# EAGLE board 13781-Variable_Load-panel.v10 (EAGLE 7.5.0), part 1 of 2
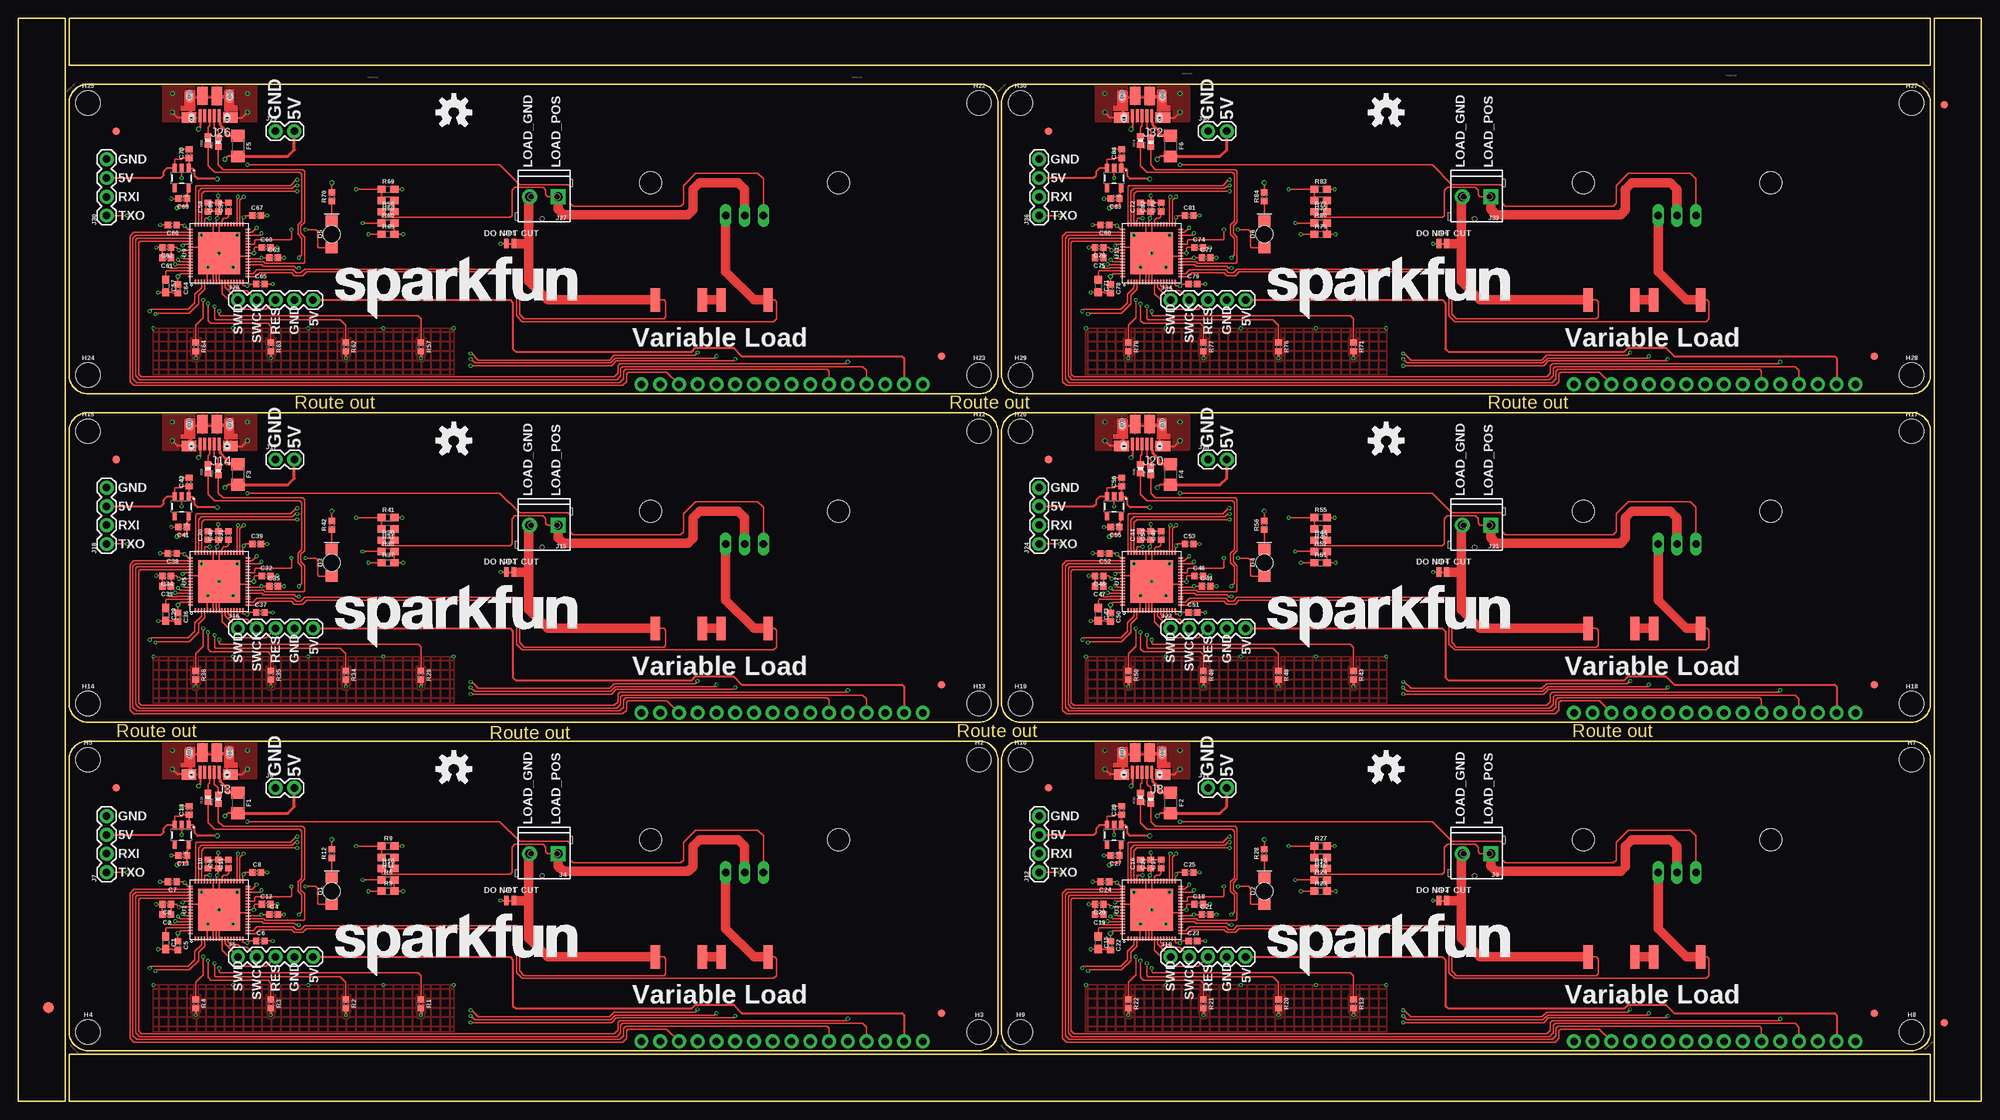
[diagram p0: board, top side]
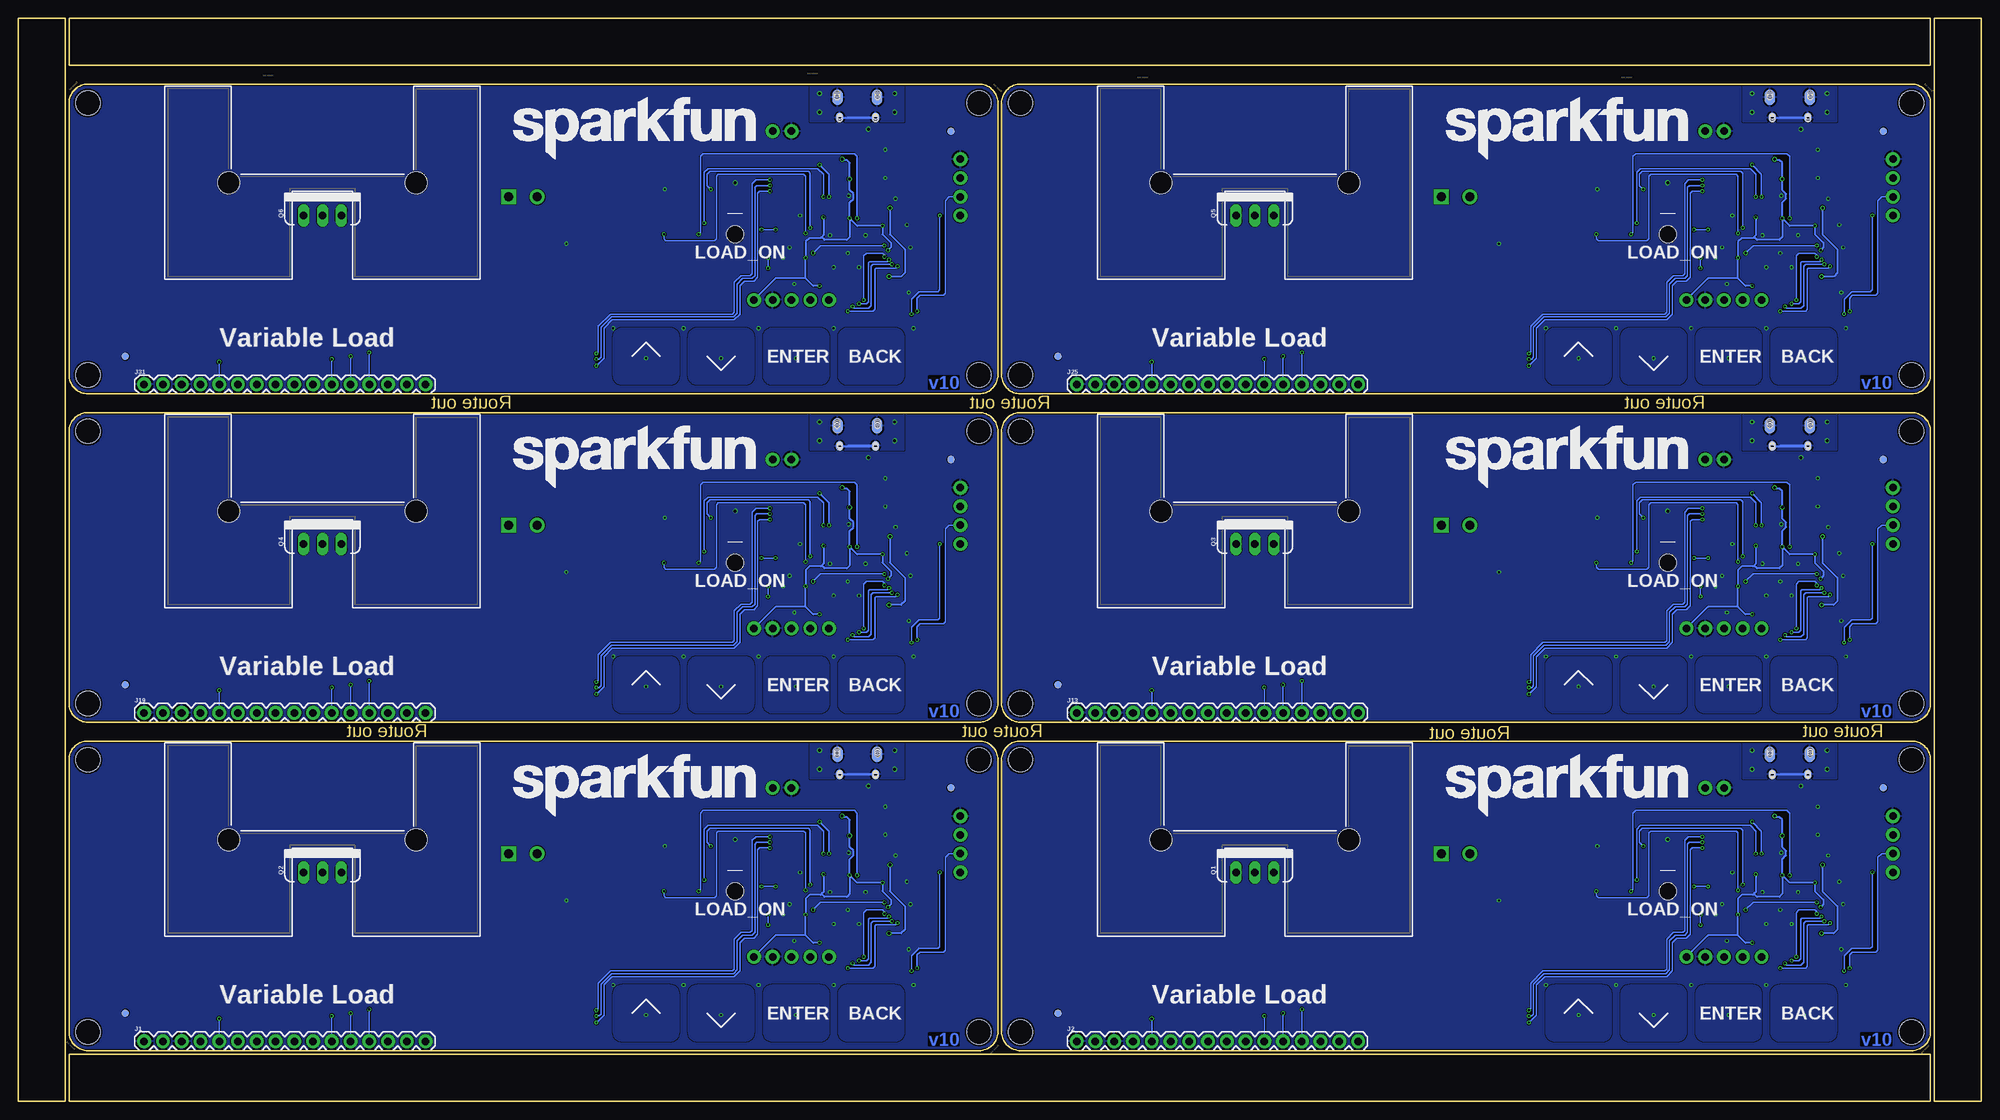
[diagram p1: board, bottom side, seen from below]

Size 265.68 x 146.56 mm. Coordinates in mm from the lower left corner, seen from the top.
Outline: 79.25,0 6.86,0 6.86,6.35 29.72,6.35
Outline: 27.18,6.35 258.83,6.35 258.83,0 76.71,0
Outline: 6.35,72.39 6.35,0 0,0 0,22.86
Outline: 0,20.32 0,146.56 6.35,146.56 6.35,69.85
Outline: 186.44,146.56 258.83,146.56 258.83,140.21 235.97,140.21
Outline: 238.51,140.21 6.86,140.21 6.86,146.56 188.98,146.56
Outline: 259.33,72.14 259.33,146.56 265.68,146.56 265.68,121.67
Outline: 265.68,124.21 265.68,0 259.33,0 259.33,74.68
Outline: 9.4,6.86 130.05,6.86 arc90 132.59,9.4 132.59,46.23 arc90 130.05,48.77 9.4,48.77 arc90 6.86,46.23 6.86,9.4 arc90 9.4,6.86
Outline: 135.64,6.86 256.29,6.86 arc90 258.83,9.4 258.83,46.23 arc90 256.29,48.77 135.64,48.77 arc90 133.1,46.23 133.1,9.4 arc90 135.64,6.86
Outline: 9.4,51.31 130.05,51.31 arc90 132.59,53.85 132.59,90.68 arc90 130.05,93.22 9.4,93.22 arc90 6.86,90.68 6.86,53.85 arc90 9.4,51.31
Outline: 135.64,51.31 256.29,51.31 arc90 258.83,53.85 258.83,90.68 arc90 256.29,93.22 135.64,93.22 arc90 133.1,90.68 133.1,53.85 arc90 135.64,51.31
Outline: 9.4,95.76 130.05,95.76 arc90 132.59,98.3 132.59,135.13 arc90 130.05,137.67 9.4,137.67 arc90 6.86,135.13 6.86,98.3 arc90 9.4,95.76
Outline: 135.64,95.76 256.29,95.76 arc90 258.83,98.3 258.83,135.13 arc90 256.29,137.67 135.64,137.67 arc90 133.1,135.13 133.1,98.3 arc90 135.64,95.76
Copper layers (1*16): Top 0.035mm / dielectric 1.5mm / Bottom 0.035mm
Design rules "SparkFun-2-layer-FAB-LIMIT": minimum track width 4mil, minimum drill 6mil, track to track 4mil, track to pad 4mil, pad to pad 4mil, via to via 4mil, smd to smd 4mil, copper to edge 4mil, drill to drill 4mil, minimum pad ring 5mil, minimum via ring 5mil, stop-mask expansion 4mil, vias tented up to drill 25mil, thermal gap 10mil
tRestrict: 6 lines

## Footprints (pad centres in the part's own frame; a part is rotated, then mirrored left to right if it is on the bottom)
0603 = smd 1.1 x 1: 1 -0.85,0; 2 0.85,0
0402 = smd 0.85 x 0.9: 1 -0.58,0; 2 0.58,0
LED-1206-BOTTOM = smd 1.5 x 1.6: A -1.8,0; C 1.8,0 | hole 2.3: 0,0
FIDUCIAL-1.5X3 = smd 1.5 x 1.5: 1 0,0
FIDUCIAL-1X2 = smd 1 x 1: 1 0,0
1206 = smd 1.6 x 1.8: 1 -1.4,0; 2 1.4,0
6400BG_HEATSINK = hole 2.997: -12.7,0; 12.7,0
STAND-OFF = hole 3.302: 0,0
1X16 = drill 1.016 pad 1.88: 1 0,0; 2 2.54,0; 3 5.08,0; 4 7.62,0; 5 10.16,0; 6 12.7,0; 7 15.24,0; 8 17.78,0; 9 20.32,0; 10 22.86,0; 11 25.4,0; 12 27.94,0; 13 30.48,0; 14 33.02,0; 15 35.56,0; 16 38.1,0
USB-MICROB-PTH = smd 0.4 x 1.75: D+ 0.031,1.331; D- -0.619,1.331; GND 1.331,1.331; ID 0.681,1.331; VBUS -1.269,1.331 | smd 1.4 x 2.1 bottom: P$1 2.701,-1.142; P$3 -2.659,-1.144 | smd 1 x 1.3: P$2 2.487,1.594; P$6 -2.368,1.604 | smd 1 x 1.3 bottom: P$4 -2.368,1.604; P$10 2.481,1.598 | smd 1.1 x 1.5: P$8 2.701,-1.142; P$12 -2.659,-1.144 | smd 2 x 1.46: SHEILD2 2.831,1.606; SHIELD -2.794,1.606 | smd 1.425 x 2.5: SHIELD3 -0.979,-1.349; SHIELD4 0.996,-1.352 | hole 0.7: -2.693,-1.134; -2.693,-1.3; -2.694,-1.499; -2.694,-1.664; 2.768,-1.134; 2.767,-1.303; 2.766,-1.496; 2.766,-1.664 | hole 0.66: -2.359,1.821; -2.349,1.691; -2.359,1.541; -2.354,1.432; 2.481,1.821; 2.491,1.691; 2.481,1.541; 2.486,1.432
SCREWTERMINAL-3.5MM-2_LOCK = drill 1.2 pad 2.032 square: 1 -0.178,0 | drill 1.2 pad 2.032: 2 3.678,0
1X05 = drill 1.016 pad 1.88: 1 0,0; 2 2.54,0; 3 5.08,0; 4 7.62,0; 5 10.16,0
1X02 = drill 1.016 pad 1.88: 1 0,0; 2 2.54,0
1X04 = drill 1.016 pad 1.88: 1 0,0; 2 2.54,0; 3 5.08,0; 4 7.62,0
SMT-JUMPER_2_NC_TRACE_NO-SILK = smd 0.635 x 1.27: 1 -0.508,0; 2 0.508,0
TO220V = drill 1.016 long: 1 -2.54,0; 2 0,0; 3 2.54,0
2512 = smd 1.27 x 3.175: P$1 -3.175,0; P$2 3.175,0
0402-RES = smd 0.85 x 0.9: 1 -0.58,0; 2 0.58,0
QFN-68 = smd 0.6 x 0.2: 1 -3.9,3.2; 2 -3.9,2.8; 3 -3.9,2.4; 4 -3.9,2; 5 -3.9,1.6; 6 -3.9,1.2; 7 -3.9,0.8; 8 -3.9,0.4; 9 -3.9,0; 10 -3.9,-0.4; 11 -3.9,-0.8; 12 -3.9,-1.2; 13 -3.9,-1.6; 14 -3.9,-2; 15 -3.9,-2.4; 16 -3.9,-2.8; 17 -3.9,-3.2; 35 3.9,-3.2; 36 3.9,-2.8; 37 3.9,-2.4; 38 3.9,-2; 39 3.9,-1.6; 40 3.9,-1.2; 41 3.9,-0.8; 42 3.9,-0.4; 43 3.9,0; 44 3.9,0.4; 45 3.9,0.8; 46 3.9,1.2; 47 3.9,1.6; 48 3.9,2; 49 3.9,2.4; 50 3.9,2.8; 51 3.9,3.2 | smd 0.2 x 0.6: 18 -3.2,-3.9; 19 -2.8,-3.9; 20 -2.4,-3.9; 21 -2,-3.9; 22 -1.6,-3.9; 23 -1.2,-3.9; 24 -0.8,-3.9; 25 -0.4,-3.9; 26 0,-3.9; 27 0.4,-3.9; 28 0.8,-3.9; 29 1.2,-3.9; 30 1.6,-3.9; 31 2,-3.9; 32 2.4,-3.9; 33 2.8,-3.9; 34 3.2,-3.9; 52 3.2,3.9; 53 2.8,3.9; 54 2.4,3.9; 55 2,3.9; 56 1.6,3.9; 57 1.2,3.9; 58 0.8,3.9; 59 0.4,3.9; 60 0,3.9; 61 -0.4,3.9; 62 -0.8,3.9; 63 -1.2,3.9; 64 -1.6,3.9; 65 -2,3.9; 66 -2.4,3.9; 67 -2.8,3.9; 68 -3.2,3.9 | smd 5.7 x 5.7: 69 0,0
SOT23-5 = smd 0.55 x 1.2: 1 -0.95,-1.3; 2 0,-1.3; 3 0.95,-1.3; 4 0.95,1.3; 5 -0.95,1.3

## Placement (x,y rotation side)
C1  2.2nF  [0603]  19.94,21.46 270 top
C2  0.1uF  [0402]  20.07,25.27 180 top
C3  1.0uF  [0402]  20.07,26.67 180 top
C4  0.1uF  [0402]  34.54,25.27 0 top
C5  0.1uF  [0402]  21.59,21.08 270 top
C6  0.1uF  [0402]  32.77,21.72 0 top
C7  0.1uF  [0402]  20.83,29.72 180 top
C8  0.1uF  [0402]  32.26,30.99 0 top
C9  0.1uF  [0402]  27.05,32.13 90 top
C10  1.0uF  [0402]  25.65,32.13 90 top
C11  1.0uF  [0402]  28.45,32.13 90 top
C12  1.0uF  [0402]  33.53,26.67 0 top
C13  1.0uF  [0402]  22.23,33.27 180 top
C14  1.0uF  [0402]  23.11,39.37 90 top
C15  2.2nF  [0603]  146.18,21.46 270 top
C16  1.0uF  [0402]  151.89,32.13 90 top
C17  1.0uF  [0402]  154.69,32.13 90 top
C18  1.0uF  [0402]  159.77,26.67 0 top
C19  0.1uF  [0402]  146.3,25.27 180 top
C20  1.0uF  [0402]  146.3,26.67 180 top
C21  0.1uF  [0402]  160.78,25.27 0 top
C22  0.1uF  [0402]  147.83,21.08 270 top
C23  0.1uF  [0402]  159,21.72 0 top
C24  0.1uF  [0402]  147.07,29.72 180 top
C25  0.1uF  [0402]  158.5,30.99 0 top
C26  0.1uF  [0402]  153.29,32.13 90 top
C27  1.0uF  [0402]  148.46,33.27 180 top
C28  1.0uF  [0402]  149.35,39.37 90 top
C29  2.2nF  [0603]  19.94,65.91 270 top
C30  1.0uF  [0402]  25.65,76.58 90 top
C31  1.0uF  [0402]  28.45,76.58 90 top
C32  1.0uF  [0402]  33.53,71.12 0 top
C33  0.1uF  [0402]  20.07,69.72 180 top
C34  1.0uF  [0402]  20.07,71.12 180 top
C35  0.1uF  [0402]  34.54,69.72 0 top
C36  0.1uF  [0402]  21.59,65.53 270 top
C37  0.1uF  [0402]  32.77,66.17 0 top
C38  0.1uF  [0402]  20.83,74.17 180 top
C39  0.1uF  [0402]  32.26,75.44 0 top
C40  0.1uF  [0402]  27.05,76.58 90 top
C41  1.0uF  [0402]  22.23,77.72 180 top
C42  1.0uF  [0402]  23.11,83.82 90 top
C43  2.2nF  [0603]  146.18,65.91 270 top
C44  1.0uF  [0402]  151.89,76.58 90 top
C45  1.0uF  [0402]  154.69,76.58 90 top
C46  1.0uF  [0402]  159.77,71.12 0 top
C47  0.1uF  [0402]  146.3,69.72 180 top
C48  1.0uF  [0402]  146.3,71.12 180 top
C49  0.1uF  [0402]  160.78,69.72 0 top
C50  0.1uF  [0402]  147.83,65.53 270 top
C51  0.1uF  [0402]  159,66.17 0 top
C52  0.1uF  [0402]  147.07,74.17 180 top
C53  0.1uF  [0402]  158.5,75.44 0 top
C54  0.1uF  [0402]  153.29,76.58 90 top
C55  1.0uF  [0402]  148.46,77.72 180 top
C56  1.0uF  [0402]  149.35,83.82 90 top
C57  2.2nF  [0603]  19.94,110.36 270 top
C58  1.0uF  [0402]  25.65,121.03 90 top
C59  1.0uF  [0402]  28.45,121.03 90 top
C60  1.0uF  [0402]  33.53,115.57 0 top
C61  0.1uF  [0402]  20.07,114.17 180 top
C62  1.0uF  [0402]  20.07,115.57 180 top
C63  0.1uF  [0402]  34.54,114.17 0 top
C64  0.1uF  [0402]  21.59,109.98 270 top
C65  0.1uF  [0402]  32.77,110.62 0 top
C66  0.1uF  [0402]  20.83,118.62 180 top
C67  0.1uF  [0402]  32.26,119.89 0 top
C68  0.1uF  [0402]  27.05,121.03 90 top
C69  1.0uF  [0402]  22.23,122.17 180 top
C70  1.0uF  [0402]  23.11,128.27 90 top
C71  2.2nF  [0603]  146.18,110.36 270 top
C72  1.0uF  [0402]  151.89,121.03 90 top
C73  1.0uF  [0402]  154.69,121.03 90 top
C74  1.0uF  [0402]  159.77,115.57 0 top
C75  0.1uF  [0402]  146.3,114.17 180 top
C76  1.0uF  [0402]  146.3,115.57 180 top
C77  0.1uF  [0402]  160.78,114.17 0 top
C78  0.1uF  [0402]  147.83,109.98 270 top
C79  0.1uF  [0402]  159,110.62 0 top
C80  0.1uF  [0402]  147.07,118.62 180 top
C81  0.1uF  [0402]  158.5,119.89 0 top
C82  0.1uF  [0402]  153.29,121.03 90 top
C83  1.0uF  [0402]  148.46,122.17 180 top
C84  1.0uF  [0402]  149.35,128.27 90 top
D1  GREEN  [LED-1206-BOTTOM]  42.42,28.45 90 top
D2  GREEN  [LED-1206-BOTTOM]  168.66,28.45 90 top
D3  GREEN  [LED-1206-BOTTOM]  42.42,72.9 90 top
D4  GREEN  [LED-1206-BOTTOM]  168.66,72.9 90 top
D5  GREEN  [LED-1206-BOTTOM]  42.42,117.35 90 top
D6  GREEN  [LED-1206-BOTTOM]  168.66,117.35 90 top
E$1  [FIDUCIAL-1.5X3]  4.06,12.7 0 top
E$7  [FIDUCIAL-1X2]  260.73,134.87 180 top
E$8  [FIDUCIAL-1X2]  260.73,10.67 0 top
F1  6V/0.5A  [1206]  29.72,40.39 270 top
F2  6V/0.5A  [1206]  155.96,40.39 270 top
F3  6V/0.5A  [1206]  29.72,84.84 270 top
F4  6V/0.5A  [1206]  155.96,84.84 270 top
F5  6V/0.5A  [1206]  29.72,129.29 270 top
F6  6V/0.5A  [1206]  155.96,129.29 270 top
FD1  FIDUCIAL1X2  [FIDUCIAL-1X2]  124.97,11.94 0 bottom
FD2  FIDUCIAL1X2  [FIDUCIAL-1X2]  13.21,42.42 0 bottom
FD3  FIDUCIAL1X2  [FIDUCIAL-1X2]  124.97,11.94 0 top
FD4  FIDUCIAL1X2  [FIDUCIAL-1X2]  13.21,42.42 0 top
FD5  FIDUCIAL1X2  [FIDUCIAL-1X2]  251.21,11.94 0 bottom
FD6  FIDUCIAL1X2  [FIDUCIAL-1X2]  139.45,42.42 0 bottom
FD7  FIDUCIAL1X2  [FIDUCIAL-1X2]  251.21,11.94 0 top
FD8  FIDUCIAL1X2  [FIDUCIAL-1X2]  139.45,42.42 0 top
FD9  FIDUCIAL1X2  [FIDUCIAL-1X2]  124.97,56.39 0 bottom
FD10  FIDUCIAL1X2  [FIDUCIAL-1X2]  13.21,86.87 0 bottom
FD11  FIDUCIAL1X2  [FIDUCIAL-1X2]  124.97,56.39 0 top
FD12  FIDUCIAL1X2  [FIDUCIAL-1X2]  13.21,86.87 0 top
FD13  FIDUCIAL1X2  [FIDUCIAL-1X2]  251.21,56.39 0 bottom
FD14  FIDUCIAL1X2  [FIDUCIAL-1X2]  139.45,86.87 0 bottom
FD15  FIDUCIAL1X2  [FIDUCIAL-1X2]  251.21,56.39 0 top
FD16  FIDUCIAL1X2  [FIDUCIAL-1X2]  139.45,86.87 0 top
FD17  FIDUCIAL1X2  [FIDUCIAL-1X2]  124.97,100.84 0 bottom
FD18  FIDUCIAL1X2  [FIDUCIAL-1X2]  13.21,131.32 0 bottom
FD19  FIDUCIAL1X2  [FIDUCIAL-1X2]  124.97,100.84 0 top
FD20  FIDUCIAL1X2  [FIDUCIAL-1X2]  13.21,131.32 0 top
FD21  FIDUCIAL1X2  [FIDUCIAL-1X2]  251.21,100.84 0 bottom
FD22  FIDUCIAL1X2  [FIDUCIAL-1X2]  139.45,131.32 0 bottom
FD23  FIDUCIAL1X2  [FIDUCIAL-1X2]  251.21,100.84 0 top
FD24  FIDUCIAL1X2  [FIDUCIAL-1X2]  139.45,131.32 0 top
H1  6400BG_HEATSINK  [6400BG_HEATSINK]  98.3,35.43 180 bottom
H2  STAND-OFF  [STAND-OFF]  130.05,46.23 0 top
H3  STAND-OFF  [STAND-OFF]  130.05,9.4 0 top
H4  STAND-OFF  [STAND-OFF]  9.4,9.4 0 top
H5  STAND-OFF  [STAND-OFF]  9.4,46.23 0 top
H6  6400BG_HEATSINK  [6400BG_HEATSINK]  224.54,35.43 180 bottom
H7  STAND-OFF  [STAND-OFF]  256.29,46.23 0 top
H8  STAND-OFF  [STAND-OFF]  256.29,9.4 0 top
H9  STAND-OFF  [STAND-OFF]  135.64,9.4 0 top
H10  STAND-OFF  [STAND-OFF]  135.64,46.23 0 top
H11  6400BG_HEATSINK  [6400BG_HEATSINK]  98.3,79.88 180 bottom
H12  STAND-OFF  [STAND-OFF]  130.05,90.68 0 top
H13  STAND-OFF  [STAND-OFF]  130.05,53.85 0 top
H14  STAND-OFF  [STAND-OFF]  9.4,53.85 0 top
H15  STAND-OFF  [STAND-OFF]  9.4,90.68 0 top
H16  6400BG_HEATSINK  [6400BG_HEATSINK]  224.54,79.88 180 bottom
H17  STAND-OFF  [STAND-OFF]  256.29,90.68 0 top
H18  STAND-OFF  [STAND-OFF]  256.29,53.85 0 top
H19  STAND-OFF  [STAND-OFF]  135.64,53.85 0 top
H20  STAND-OFF  [STAND-OFF]  135.64,90.68 0 top
H21  6400BG_HEATSINK  [6400BG_HEATSINK]  98.3,124.33 180 bottom
H22  STAND-OFF  [STAND-OFF]  130.05,135.13 0 top
H23  STAND-OFF  [STAND-OFF]  130.05,98.3 0 top
H24  STAND-OFF  [STAND-OFF]  9.4,98.3 0 top
H25  STAND-OFF  [STAND-OFF]  9.4,135.13 0 top
H26  6400BG_HEATSINK  [6400BG_HEATSINK]  224.54,124.33 180 bottom
H27  STAND-OFF  [STAND-OFF]  256.29,135.13 0 top
H28  STAND-OFF  [STAND-OFF]  256.29,98.3 0 top
H29  STAND-OFF  [STAND-OFF]  135.64,98.3 0 top
H30  STAND-OFF  [STAND-OFF]  135.64,135.13 0 top
J1  [1X16]  248.67,8.13 0 bottom
J2  [1X16]  122.43,8.13 0 bottom
J3  AMP FCI 10103594-0001LF  [USB-MICROB-PTH]  25.91,45.85 180 top
J4  [SCREWTERMINAL-3.5MM-2_LOCK]  72.9,33.53 180 top
J5  [1X05]  29.72,19.56 0 top
J6  [1X02]  34.8,42.42 0 top
J7  [1X04]  11.94,30.99 90 top
J8  AMP FCI 10103594-0001LF  [USB-MICROB-PTH]  152.15,45.85 180 top
J9  [SCREWTERMINAL-3.5MM-2_LOCK]  199.14,33.53 180 top
J10  [1X05]  155.96,19.56 0 top
J11  [1X02]  161.04,42.42 0 top
J12  [1X04]  138.18,30.99 90 top
J13  [1X16]  122.43,52.58 0 bottom
J14  AMP FCI 10103594-0001LF  [USB-MICROB-PTH]  25.91,90.3 180 top
J15  [SCREWTERMINAL-3.5MM-2_LOCK]  72.9,77.98 180 top
J16  [1X05]  29.72,64.01 0 top
J17  [1X02]  34.8,86.87 0 top
J18  [1X04]  11.94,75.44 90 top
J19  [1X16]  248.67,52.58 0 bottom
J20  AMP FCI 10103594-0001LF  [USB-MICROB-PTH]  152.15,90.3 180 top
J21  [SCREWTERMINAL-3.5MM-2_LOCK]  199.14,77.98 180 top
J22  [1X05]  155.96,64.01 0 top
J23  [1X02]  161.04,86.87 0 top
J24  [1X04]  138.18,75.44 90 top
J25  [1X16]  122.43,97.03 0 bottom
J26  AMP FCI 10103594-0001LF  [USB-MICROB-PTH]  25.91,134.75 180 top
J27  [SCREWTERMINAL-3.5MM-2_LOCK]  72.9,122.43 180 top
J28  [1X05]  29.72,108.46 0 top
J29  [1X02]  34.8,131.32 0 top
J30  [1X04]  11.94,119.89 90 top
J31  [1X16]  248.67,97.03 0 bottom
J32  AMP FCI 10103594-0001LF  [USB-MICROB-PTH]  152.15,134.75 180 top
J33  [SCREWTERMINAL-3.5MM-2_LOCK]  199.14,122.43 180 top
J34  [1X05]  155.96,108.46 0 top
J35  [1X02]  161.04,131.32 0 top
J36  [1X04]  138.18,119.89 90 top
JP1  JUMPER-SMT_2_NC_TRACE_NO-SILK  [SMT-JUMPER_2_NC_TRACE_NO-SILK]  66.55,27.18 0 top
JP2  JUMPER-SMT_2_NC_TRACE_NO-SILK  [SMT-JUMPER_2_NC_TRACE_NO-SILK]  192.79,27.18 0 top
JP3  JUMPER-SMT_2_NC_TRACE_NO-SILK  [SMT-JUMPER_2_NC_TRACE_NO-SILK]  66.55,71.63 0 top
JP4  JUMPER-SMT_2_NC_TRACE_NO-SILK  [SMT-JUMPER_2_NC_TRACE_NO-SILK]  192.79,71.63 0 top
JP5  JUMPER-SMT_2_NC_TRACE_NO-SILK  [SMT-JUMPER_2_NC_TRACE_NO-SILK]  66.55,116.08 0 top
JP6  JUMPER-SMT_2_NC_TRACE_NO-SILK  [SMT-JUMPER_2_NC_TRACE_NO-SILK]  192.79,116.08 0 top
LOGO1  OSHW-LOGOM  [OSHW-LOGO-M]  58.93,44.96 0 top
LOGO2  SFE_LOGO_NAME.3_INCH  [SFE_LOGO_NAME_.3]  42.42,17.02 0 top
LOGO3  SFE_LOGO_NAME.3_INCH  [SFE_LOGO_NAME_.3]  72.9,38.61 0 bottom
LOGO4  OSHW-LOGOM  [OSHW-LOGO-M]  185.17,44.96 0 top
LOGO5  SFE_LOGO_NAME.3_INCH  [SFE_LOGO_NAME_.3]  168.66,17.02 0 top
LOGO6  SFE_LOGO_NAME.3_INCH  [SFE_LOGO_NAME_.3]  199.14,38.61 0 bottom
LOGO7  OSHW-LOGOM  [OSHW-LOGO-M]  58.93,89.41 0 top
LOGO8  SFE_LOGO_NAME.3_INCH  [SFE_LOGO_NAME_.3]  42.42,61.47 0 top
LOGO9  SFE_LOGO_NAME.3_INCH  [SFE_LOGO_NAME_.3]  72.9,83.06 0 bottom
LOGO10  OSHW-LOGOM  [OSHW-LOGO-M]  185.17,89.41 0 top
LOGO11  SFE_LOGO_NAME.3_INCH  [SFE_LOGO_NAME_.3]  168.66,61.47 0 top
LOGO12  SFE_LOGO_NAME.3_INCH  [SFE_LOGO_NAME_.3]  199.14,83.06 0 bottom
LOGO13  OSHW-LOGOM  [OSHW-LOGO-M]  58.93,133.86 0 top
LOGO14  SFE_LOGO_NAME.3_INCH  [SFE_LOGO_NAME_.3]  42.42,105.92 0 top
LOGO15  SFE_LOGO_NAME.3_INCH  [SFE_LOGO_NAME_.3]  72.9,127.51 0 bottom
LOGO16  OSHW-LOGOM  [OSHW-LOGO-M]  185.17,133.86 0 top
LOGO17  SFE_LOGO_NAME.3_INCH  [SFE_LOGO_NAME_.3]  168.66,105.92 0 top
LOGO18  SFE_LOGO_NAME.3_INCH  [SFE_LOGO_NAME_.3]  199.14,127.51 0 bottom
Q1  60V/32A/35mΩ  [TO220V]  98.3,30.99 0 bottom
Q2  60V/32A/35mΩ  [TO220V]  224.54,30.99 0 bottom
Q3  60V/32A/35mΩ  [TO220V]  98.3,75.44 0 bottom
Q4  60V/32A/35mΩ  [TO220V]  224.54,75.44 0 bottom
Q5  60V/32A/35mΩ  [TO220V]  98.3,119.89 0 bottom
Q6  60V/32A/35mΩ  [TO220V]  224.54,119.89 0 bottom
R1  560  [0402]  54.48,13.21 270 top
R2  560  [0402]  44.32,13.21 270 top
R3  560  [0402]  34.16,13.21 270 top
R4  560  [0402]  24,13.21 270 top
R5  47k  [0603]  50.04,28.45 0 top
R6  47k  [0603]  50.04,29.97 0 top
R7  0.05  [2512]  98.3,19.56 0 top
R8  0.05  [2512]  89.41,19.56 0 top
R9  1k  [0603]  50.04,34.54 0 top
R10  8.2k  [0603]  50.04,31.5 0 top
R11  787  [0603]  50.04,33.02 180 top
R12  560  [0402]  42.42,33.53 90 top
R13  560  [0402]  180.72,13.21 270 top
R14  8.2k  [0603]  176.28,31.5 0 top
R15  787  [0603]  176.28,33.02 180 top
R16  22  [0402-RES]  151.89,41.15 90 top
R17  22  [0402-RES]  153.29,40.89 90 top
R18  22  [0402-RES]  25.65,41.15 90 top
R19  22  [0402-RES]  27.05,40.89 90 top
R20  560  [0402]  170.56,13.21 270 top
R21  560  [0402]  160.4,13.21 270 top
R22  560  [0402]  150.24,13.21 270 top
R23  47k  [0603]  176.28,28.45 0 top
R24  47k  [0603]  176.28,29.97 0 top
R25  0.05  [2512]  224.54,19.56 0 top
R26  0.05  [2512]  215.65,19.56 0 top
R27  1k  [0603]  176.28,34.54 0 top
R28  560  [0402]  168.66,33.53 90 top
R29  560  [0402]  54.48,57.66 270 top
R30  8.2k  [0603]  50.04,75.95 0 top
R31  787  [0603]  50.04,77.47 180 top
R32  22  [0402-RES]  25.65,85.6 90 top
R33  22  [0402-RES]  27.05,85.34 90 top
R34  560  [0402]  44.32,57.66 270 top
R35  560  [0402]  34.16,57.66 270 top
R36  560  [0402]  24,57.66 270 top
R37  47k  [0603]  50.04,72.9 0 top
R38  47k  [0603]  50.04,74.42 0 top
R39  0.05  [2512]  98.3,64.01 0 top
R40  0.05  [2512]  89.41,64.01 0 top
R41  1k  [0603]  50.04,78.99 0 top
R42  560  [0402]  42.42,77.98 90 top
R43  560  [0402]  180.72,57.66 270 top
R44  8.2k  [0603]  176.28,75.95 0 top
R45  787  [0603]  176.28,77.47 180 top
R46  22  [0402-RES]  151.89,85.6 90 top
R47  22  [0402-RES]  153.29,85.34 90 top
R48  560  [0402]  170.56,57.66 270 top
R49  560  [0402]  160.4,57.66 270 top
R50  560  [0402]  150.24,57.66 270 top
R51  47k  [0603]  176.28,72.9 0 top
R52  47k  [0603]  176.28,74.42 0 top
R53  0.05  [2512]  224.54,64.01 0 top
R54  0.05  [2512]  215.65,64.01 0 top
R55  1k  [0603]  176.28,78.99 0 top
R56  560  [0402]  168.66,77.98 90 top
R57  560  [0402]  54.48,102.11 270 top
R58  8.2k  [0603]  50.04,120.4 0 top
R59  787  [0603]  50.04,121.92 180 top
R60  22  [0402-RES]  25.65,130.05 90 top
R61  22  [0402-RES]  27.05,129.79 90 top
R62  560  [0402]  44.32,102.11 270 top
R63  560  [0402]  34.16,102.11 270 top
R64  560  [0402]  24,102.11 270 top
R65  47k  [0603]  50.04,117.35 0 top
R66  47k  [0603]  50.04,118.87 0 top
R67  0.05  [2512]  98.3,108.46 0 top
R68  0.05  [2512]  89.41,108.46 0 top
R69  1k  [0603]  50.04,123.44 0 top
R70  560  [0402]  42.42,122.43 90 top
R71  560  [0402]  180.72,102.11 270 top
R72  8.2k  [0603]  176.28,120.4 0 top
R73  787  [0603]  176.28,121.92 180 top
R74  22  [0402-RES]  151.89,130.05 90 top
R75  22  [0402-RES]  153.29,129.79 90 top
R76  560  [0402]  170.56,102.11 270 top
R77  560  [0402]  160.4,102.11 270 top
R78  560  [0402]  150.24,102.11 270 top
R79  47k  [0603]  176.28,117.35 0 top
R80  47k  [0603]  176.28,118.87 0 top
R81  0.05  [2512]  224.54,108.46 0 top
R82  0.05  [2512]  215.65,108.46 0 top
R83  1k  [0603]  176.28,123.44 0 top
R84  560  [0402]  168.66,122.43 90 top
U1  CY8C5868LTI-LP039  [QFN-68]  27.18,25.91 90 top
U2  3.3V  [SOT23-5]  22.1,36.07 180 top
U3  CY8C5868LTI-LP039  [QFN-68]  153.42,25.91 90 top
U4  3.3V  [SOT23-5]  148.34,36.07 180 top
U5  CY8C5868LTI-LP039  [QFN-68]  27.18,70.36 90 top
U6  3.3V  [SOT23-5]  22.1,80.52 180 top
U7  CY8C5868LTI-LP039  [QFN-68]  153.42,70.36 90 top
U8  3.3V  [SOT23-5]  148.34,80.52 180 top
U9  CY8C5868LTI-LP039  [QFN-68]  27.18,114.81 90 top
U10  3.3V  [SOT23-5]  22.1,124.97 180 top
U11  CY8C5868LTI-LP039  [QFN-68]  153.42,114.81 90 top
U12  3.3V  [SOT23-5]  148.34,124.97 180 top

## Library data of the parts
C1 C15 C29 C43 C57 C71 = SparkFun-Capacitors; PROD_ID: CAP-07877
C2 C4-C9 C19 C21-C26 C33 C35-C40 C47 C49-C54 C61 C63-C68 C75 C77-C82 = SparkFun-Capacitors; PROD_ID: CAP-12416
C3 C10-C14 C16-C18 C20 C27 C28 C30-C32 C34 C41 C42 C44-C46 C48 C55 C56 C58-C60 C62 C69 C70 C72-C74 C76 C83 C84 = SparkFun-Capacitors; PROD_ID: CAP-12417
D1-D6 = SparkFun-LED; PROD_ID: DIO-11076
E$1 = SparkFun-Retired
E$7 E$8 FD1-FD24 LOGO1-LOGO18 = SparkFun-Aesthetics
F1-F6 = SparkFun-Fuses; PROD_ID: RES-08585
H1 H6 H11 H16 H21 H26 = SparkFun-Hardware; PROD_ID: COMP-09537; SF_SKU: PRT-09576
H2-H5 H7-H10 H12-H15 H17-H20 H22-H25 H27-H30 = SparkFun-Hardware
J1 J2 J5 J6 J10 J11 J13 J16 J17 J19 J22 J23 J25 J28 J29 J31 J34 J35 = SparkFun-Connectors
J3 J8 J14 J20 J26 J32 = SparkFun-Connectors; PROD_ID: CONN-13711
J4 J9 J15 J21 J27 J33 = SparkFun-Connectors; PROD_ID: CONN-08399
J7 J12 J18 J24 J30 J36 = SparkFun-Connectors; PROD_ID: CONN-09696
JP1-JP6 = SparkFun-Jumpers
Q1-Q6 = SparkFun-DiscreteSemi; PROD_ID: TRANS-10060
R1-R4 R12 R13 R20-R22 R28 R29 R34-R36 R42 R43 R48-R50 R56 R57 R62-R64 R70 R71 R76-R78 R84 = SparkFun-Resistors; PROD_ID: RES-13766
R5 R6 R23 R24 R37 R38 R51 R52 R65 R66 R79 R80 = SparkFun-Resistors; PROD_ID: RES-07871
R7 R8 R25 R26 R39 R40 R53 R54 R67 R68 R81 R82 = SparkFun-Resistors; PROD_ID: RES-13771
R9 R27 R41 R55 R69 R83 = SparkFun-Resistors; PROD_ID: RES-07856
R10 R14 R30 R44 R58 R72 = SparkFun-Resistors; PROD_ID: RES-10646
R11 R15 R31 R45 R59 R73 = SparkFun-Resistors; PROD_ID: RES-11228
R16-R19 R32 R33 R46 R47 R60 R61 R74 R75 = SparkFun-Resistors; PROD_ID: RES-12427
U1 U3 U5 U7 U9 U11 = SparkFun-IC-Microcontroller; PROD_ID: IC-12391
U2 U4 U6 U8 U10 U12 = SparkFun-IC-Power; PROD_ID: VREG-12457

## Nets
3.3V: C5.1 C13.1 U1.67 U2.5
3.3V1: C22.1 C27.1 U3.67 U4.5
3.3V2: C36.1 C41.1 U5.67 U6.5
3.3V3: C50.1 C55.1 U7.67 U8.5
3.3V4: C64.1 C69.1 U9.67 U10.5
3.3V5: C78.1 C83.1 U11.67 U12.5
5V: C2.1 C3.1 C4.1 C6.1 C7.1 C8.1 C9.1 C10.1 C14.1 F1.2 J2.2 J5.5 J6.2 J7.3 U1.17 U1.24 U1.35 U1.44 U1.52 U1.59 U2.1 U2.3
5V1: C16.1 C19.1 C20.1 C21.1 C23.1 C24.1 C25.1 C26.1 C28.1 F2.2 J1.2 J10.5 J11.2 J12.3 U3.17 U3.24 U3.35 U3.44 U3.52 U3.59 U4.1 U4.3
5V2: C30.1 C33.1 C34.1 C35.1 C37.1 C38.1 C39.1 C40.1 C42.1 F3.2 J13.2 J16.5 J17.2 J18.3 U5.17 U5.24 U5.35 U5.44 U5.52 U5.59 U6.1 U6.3
5V3: C44.1 C47.1 C48.1 C49.1 C51.1 C52.1 C53.1 C54.1 C56.1 F4.2 J19.2 J22.5 J23.2 J24.3 U7.17 U7.24 U7.35 U7.44 U7.52 U7.59 U8.1 U8.3
5V4: C58.1 C61.1 C62.1 C63.1 C65.1 C66.1 C67.1 C68.1 C70.1 F5.2 J25.2 J28.5 J29.2 J30.3 U9.17 U9.24 U9.35 U9.44 U9.52 U9.59 U10.1 U10.3
5V5: C72.1 C75.1 C76.1 C77.1 C79.1 C80.1 C81.1 C82.1 C84.1 F6.2 J31.2 J34.5 J35.2 J36.3 U11.17 U11.24 U11.35 U11.44 U11.52 U11.59 U12.1 U12.3
BACK: R4.2
BACK1: R22.2
BACK2: R36.2
BACK3: R50.2
BACK4: R64.2
BACK5: R78.2
D+: J3.D+ R18.2
D+1: J8.D+ R16.2
D+2: J14.D+ R32.2
D+3: J20.D+ R46.2
D+4: J26.D+ R60.2
D+5: J32.D+ R74.2
D-: J3.D- R19.2
D-1: J8.D- R17.2
D-2: J14.D- R33.2
D-3: J20.D- R47.2
D-4: J26.D- R61.2
D-5: J32.D- R75.2
DOWN: R2.2
DOWN1: R20.2
DOWN2: R34.2
DOWN3: R48.2
DOWN4: R62.2
DOWN5: R76.2
ENTER: R3.2
ENTER1: R21.2
ENTER2: R35.2
ENTER3: R49.2
ENTER4: R63.2
ENTER5: R77.2
GND: C1.2 C2.2 C3.2 C4.2 C5.2 C6.2 C7.2 C8.2 C9.2 C10.2 C11.2 C12.2 C13.2 C14.2 J2.1 J2.3 J3.GND J5.4 J6.1 J7.4 JP1.1 R9.2 R12.2 U1.5 U1.7 U1.8 U1.9 U1.25 U1.43 U1.45 U1.58 U1.69 U2.2
GND1: C15.2 C16.2 C17.2 C18.2 C19.2 C20.2 C21.2 C22.2 C23.2 C24.2 C25.2 C26.2 C27.2 C28.2 J1.1 J1.3 J8.GND J10.4 J11.1 J12.4 JP2.1 R27.2 R28.2 U3.5 U3.7 U3.8 U3.9 U3.25 U3.43 U3.45 U3.58 U3.69 U4.2
GND2: C29.2 C30.2 C31.2 C32.2 C33.2 C34.2 C35.2 C36.2 C37.2 C38.2 C39.2 C40.2 C41.2 C42.2 J13.1 J13.3 J14.GND J16.4 J17.1 J18.4 JP3.1 R41.2 R42.2 U5.5 U5.7 U5.8 U5.9 U5.25 U5.43 U5.45 U5.58 U5.69 U6.2
GND3: C43.2 C44.2 C45.2 C46.2 C47.2 C48.2 C49.2 C50.2 C51.2 C52.2 C53.2 C54.2 C55.2 C56.2 J19.1 J19.3 J20.GND J22.4 J23.1 J24.4 JP4.1 R55.2 R56.2 U7.5 U7.7 U7.8 U7.9 U7.25 U7.43 U7.45 U7.58 U7.69 U8.2
GND4: C57.2 C58.2 C59.2 C60.2 C61.2 C62.2 C63.2 C64.2 C65.2 C66.2 C67.2 C68.2 C69.2 C70.2 J25.1 J25.3 J26.GND J28.4 J29.1 J30.4 JP5.1 R69.2 R70.2 U9.5 U9.7 U9.8 U9.9 U9.25 U9.43 U9.45 U9.58 U9.69 U10.2
GND5: C71.2 C72.2 C73.2 C74.2 C75.2 C76.2 C77.2 C78.2 C79.2 C80.2 C81.2 C82.2 C83.2 C84.2 J31.1 J31.3 J32.GND J34.4 J35.1 J36.4 JP6.1 R83.2 R84.2 U11.5 U11.7 U11.8 U11.9 U11.25 U11.43 U11.45 U11.58 U11.69 U12.2
GND-ISO: J4.2 JP1.2 R8.P$1 U1.19
GND-ISO1: J9.2 JP2.2 R26.P$1 U3.19
GND-ISO2: J15.2 JP3.2 R40.P$1 U5.19
GND-ISO3: J21.2 JP4.2 R54.P$1 U7.19
GND-ISO4: J27.2 JP5.2 R68.P$1 U9.19
GND-ISO5: J33.2 JP6.2 R82.P$1 U11.19
I_SENSE_HIGH: Q1.3 R7.P$2 U1.18
I_SENSE_HIGH1: Q2.3 R25.P$2 U3.18
I_SENSE_HIGH2: Q3.3 R39.P$2 U5.18
I_SENSE_HIGH3: Q4.3 R53.P$2 U7.18
I_SENSE_HIGH4: Q5.3 R67.P$2 U9.18
I_SENSE_HIGH5: Q6.3 R81.P$2 U11.18
I_SET: Q1.1 U1.37
I_SET1: Q2.1 U3.37
I_SET2: Q3.1 U5.37
I_SET3: Q4.1 U7.37
I_SET4: Q5.1 U9.37
I_SET5: Q6.1 U11.37
I_SET_SUM: R5.2 R6.2 U1.32
I_SET_SUM1: R23.2 R24.2 U3.32
I_SET_SUM2: R37.2 R38.2 U5.32
I_SET_SUM3: R51.2 R52.2 U7.32
I_SET_SUM4: R65.2 R66.2 U9.32
I_SET_SUM5: R79.2 R80.2 U11.32
LCD_D1: J1.11 U3.49
LCD_D2: J1.12 U3.50
LCD_D3: J1.13 U3.51
LCD_D4: J2.11 U1.49
LCD_D5: J2.12 U1.50
LCD_D6: J2.13 U1.51
LCD_D7: J2.14 U1.53
LCD_D8: J1.14 U3.53
LCD_D9: J13.11 U5.49
LCD_D10: J13.12 U5.50
LCD_D11: J13.13 U5.51
LCD_D12: J13.14 U5.53
LCD_D13: J19.11 U7.49
LCD_D14: J19.12 U7.50
LCD_D15: J19.13 U7.51
LCD_D16: J19.14 U7.53
LCD_D17: J25.11 U9.49
LCD_D18: J25.12 U9.50
LCD_D19: J25.13 U9.51
LCD_D20: J25.14 U9.53
LCD_D21: J31.11 U11.49
LCD_D22: J31.12 U11.50
LCD_D23: J31.13 U11.51
LCD_D24: J31.14 U11.53
LCD_E: J2.6 U1.54
LCD_E1: J1.6 U3.54
LCD_E2: J13.6 U5.54
LCD_E3: J19.6 U7.54
LCD_E4: J25.6 U9.54
LCD_E5: J31.6 U11.54
LCD_RS: J2.4 U1.55
LCD_RS1: J1.4 U3.55
LCD_RS2: J13.4 U5.55
LCD_RS3: J19.4 U7.55
LCD_RS4: J25.4 U9.55
LCD_RS5: J31.4 U11.55
LCD_RW: J2.5 U1.56
LCD_RW1: J1.5 U3.56
LCD_RW2: J13.5 U5.56
LCD_RW3: J19.5 U7.56
LCD_RW4: J25.5 U9.56
LCD_RW5: J31.5 U11.56
N$1: R1.1 U1.65
N$2: R2.1 U1.64
N$3: R3.1 U1.63
N$4: R4.1 U1.62
N$5: C1.1 U1.66
N$6: C12.1 U1.26 U1.57
N$7: C11.1 U1.42
N$8: R18.1 U1.22
N$9: R19.1 U1.23
N$10: R5.1 U1.48
N$11: R6.1 U1.36
N$12: D1.A U1.29
N$13: D1.C R12.1
N$14: F1.1 J3.VBUS
N$15: J4.1 Q1.2 R10.1
N$16: R10.2 R11.1
N$17: C15.1 U3.66
N$18: R7.P$1 R8.P$2
N$19: R23.1 U3.48
N$20: C18.1 U3.26 U3.57
N$21: C17.1 U3.42
N$22: R16.1 U3.22
N$23: R17.1 U3.23
N$24: F2.1 J8.VBUS
N$25: J9.1 Q2.2 R14.1
N$26: R14.2 R15.1
N$27: R25.P$1 R26.P$2
N$28: R13.1 U3.65
N$29: R20.1 U3.64
N$30: R21.1 U3.63
N$31: R22.1 U3.62
N$32: R24.1 U3.36
N$33: D2.A U3.29
N$34: D2.C R28.1
N$35: C29.1 U5.66
N$36: R37.1 U5.48
N$37: C32.1 U5.26 U5.57
N$38: C31.1 U5.42
N$39: R32.1 U5.22
N$40: R33.1 U5.23
N$41: F3.1 J14.VBUS
N$42: J15.1 Q3.2 R30.1
N$43: R30.2 R31.1
N$44: R39.P$1 R40.P$2
N$45: R29.1 U5.65
N$46: R34.1 U5.64
N$47: R35.1 U5.63
N$48: R36.1 U5.62
N$49: R38.1 U5.36
N$50: D3.A U5.29
N$51: D3.C R42.1
N$52: C43.1 U7.66
N$53: R51.1 U7.48
N$54: C46.1 U7.26 U7.57
N$55: C45.1 U7.42
N$56: R46.1 U7.22
N$57: R47.1 U7.23
N$58: F4.1 J20.VBUS
N$59: J21.1 Q4.2 R44.1
N$60: R44.2 R45.1
N$61: R53.P$1 R54.P$2
N$62: R43.1 U7.65
N$63: R48.1 U7.64
N$64: R49.1 U7.63
N$65: R50.1 U7.62
N$66: R52.1 U7.36
N$67: D4.A U7.29
N$68: D4.C R56.1
N$69: C57.1 U9.66
N$70: R65.1 U9.48
N$71: C60.1 U9.26 U9.57
N$72: C59.1 U9.42
N$73: R60.1 U9.22
N$74: R61.1 U9.23
N$75: F5.1 J26.VBUS
N$76: J27.1 Q5.2 R58.1
N$77: R58.2 R59.1
N$78: R67.P$1 R68.P$2
N$79: R57.1 U9.65
N$80: R62.1 U9.64
N$81: R63.1 U9.63
N$82: R64.1 U9.62
N$83: R66.1 U9.36
N$84: D5.A U9.29
N$85: D5.C R70.1
N$86: C71.1 U11.66
N$87: R79.1 U11.48
N$88: C74.1 U11.26 U11.57
N$89: C73.1 U11.42
N$90: R74.1 U11.22
N$91: R75.1 U11.23
N$92: F6.1 J32.VBUS
N$93: J33.1 Q6.2 R72.1
N$94: R72.2 R73.1
N$95: R81.P$1 R82.P$2
N$96: R71.1 U11.65
N$97: R76.1 U11.64
N$98: R77.1 U11.63
N$99: R78.1 U11.62
N$100: R80.1 U11.36
N$101: D6.A U11.29
N$102: D6.C R84.1
RXI: J7.2 U1.3
RXI1: J12.2 U3.3
RXI2: J18.2 U5.3
RXI3: J24.2 U7.3
RXI4: J30.2 U9.3
RXI5: J36.2 U11.3
SHIELD: J3.P$1 J3.P$2 J3.P$3 J3.P$4 J3.P$6 J3.P$8 J3.P$10 J3.P$12 J3.SHEILD2 J3.SHIELD J3.SHIELD3 J3.SHIELD4
SHIELD1: J8.P$1 J8.P$2 J8.P$3 J8.P$4 J8.P$6 J8.P$8 J8.P$10 J8.P$12 J8.SHEILD2 J8.SHIELD J8.SHIELD3 J8.SHIELD4
SHIELD2: J14.P$1 J14.P$2 J14.P$3 J14.P$4 J14.P$6 J14.P$8 J14.P$10 J14.P$12 J14.SHEILD2 J14.SHIELD J14.SHIELD3 J14.SHIELD4
SHIELD3: J20.P$1 J20.P$2 J20.P$3 J20.P$4 J20.P$6 J20.P$8 J20.P$10 J20.P$12 J20.SHEILD2 J20.SHIELD J20.SHIELD3 J20.SHIELD4
SHIELD4: J26.P$1 J26.P$2 J26.P$3 J26.P$4 J26.P$6 J26.P$8 J26.P$10 J26.P$12 J26.SHEILD2 J26.SHIELD J26.SHIELD3 J26.SHIELD4
SHIELD5: J32.P$1 J32.P$2 J32.P$3 J32.P$4 J32.P$6 J32.P$8 J32.P$10 J32.P$12 J32.SHEILD2 J32.SHIELD J32.SHIELD3 J32.SHIELD4
SWDCK: J5.2 U1.12
SWDCK1: J10.2 U3.12
SWDCK2: J16.2 U5.12
SWDCK3: J22.2 U7.12
SWDCK4: J28.2 U9.12
SWDCK5: J34.2 U11.12
SWDIO: J5.1 U1.11
SWDIO1: J10.1 U3.11
SWDIO2: J16.1 U5.11
SWDIO3: J22.1 U7.11
SWDIO4: J28.1 U9.11
SWDIO5: J34.1 U11.11
TXO: J7.1 U1.4
TXO1: J12.1 U3.4
TXO2: J18.1 U5.4
TXO3: J24.1 U7.4
TXO4: J30.1 U9.4
TXO5: J36.1 U11.4
UP: R1.2
UP1: R13.2
UP2: R29.2
UP3: R43.2
UP4: R57.2
UP5: R71.2
V_SENSE: R9.1 R11.2 U1.33
V_SENSE1: R15.2 R27.1 U3.33
V_SENSE2: R31.2 R41.1 U5.33
V_SENSE3: R45.2 R55.1 U7.33
V_SENSE4: R59.2 R69.1 U9.33
V_SENSE5: R73.2 R83.1 U11.33
XRES: J5.3 U1.10
XRES1: J10.3 U3.10
XRES2: J16.3 U5.10
XRES3: J22.3 U7.10
XRES4: J28.3 U9.10
XRES5: J34.3 U11.10

## Tracks (layer width: path | path; a pad name or v marks a point on that pad's centre or on a via)
3.3V  (via drill 0.38)
  Top 0.203: C5.1 v21.59,22.73 21.97,23.11 U1.67 | U2.5 23.05,34.1 22.8,33.85 C13.1
  Top 0.254: C13.1 22.8,32.46 22.61,32.26 21.72,32.26 v21.46,32
  Bottom 0.254: v21.46,32 21.46,28.45 19.43,26.42 19.43,23.24 19.94,22.73 v21.59,22.73
3.3V1  (via drill 0.38)
  Top 0.203: C22.1 v147.83,22.73 148.21,23.11 U3.67 | U4.5 149.29,34.1 149.04,33.85 C27.1
  Top 0.254: C27.1 149.04,32.46 148.84,32.26 147.96,32.26 v147.7,32
  Bottom 0.254: v147.7,32 147.7,28.45 145.67,26.42 145.67,23.24 146.18,22.73 v147.83,22.73
3.3V2  (via drill 0.38)
  Top 0.203: C36.1 v21.59,67.18 21.97,67.56 U5.67 | U6.5 23.05,78.55 22.8,78.3 C41.1
  Top 0.254: C41.1 22.8,76.91 22.61,76.71 21.72,76.71 v21.46,76.45
  Bottom 0.254: v21.46,76.45 21.46,72.9 19.43,70.87 19.43,67.69 19.94,67.18 v21.59,67.18
3.3V3  (via drill 0.38)
  Top 0.203: C50.1 v147.83,67.18 148.21,67.56 U7.67 | U8.5 149.29,78.55 149.04,78.3 C55.1
  Top 0.254: C55.1 149.04,76.91 148.84,76.71 147.96,76.71 v147.7,76.45
  Bottom 0.254: v147.7,76.45 147.7,72.9 145.67,70.87 145.67,67.69 146.18,67.18 v147.83,67.18
3.3V4  (via drill 0.38)
  Top 0.203: C64.1 v21.59,111.63 21.97,112.01 U9.67 | U10.5 23.05,123 22.8,122.75 C69.1
  Top 0.254: C69.1 22.8,121.36 22.61,121.16 21.72,121.16 v21.46,120.9
  Bottom 0.254: v21.46,120.9 21.46,117.35 19.43,115.32 19.43,112.14 19.94,111.63 v21.59,111.63
3.3V5  (via drill 0.38)
  Top 0.203: C78.1 v147.83,111.63 148.21,112.01 U11.67 | U12.5 149.29,123 149.04,122.75 C83.1
  Top 0.254: C83.1 149.04,121.36 148.84,121.16 147.96,121.16 v147.7,120.9
  Bottom 0.254: v147.7,120.9 147.7,117.35 145.67,115.32 145.67,112.14 146.18,111.63 v147.83,111.63
5V  (via drill 0.25, 0.3, 0.38)
  Top 0.203: U1.44 26.78,30.46 v26.92,30.61 27.05,30.73 C9.1 C10.1 | U1.24 32.73,25.11 v32.89,25.27 C4.1 | U1.17 30.38,21.57 30.48,21.46 v30.99,21.46 31.24,21.72 C6.1 | U1.59 21.7,26.31 | 21.7,26.31 21.34,26.67 C3.1 C2.1 | 21.7,26.31 v21.72,26.29 | C7.1 22.35,29.72 v22.48,29.59 22.96,29.11 U1.52 | C8.1 30.73,30.99 v30.48,30.73 30.38,30.63 U1.35 | U2.3 21.15,38.55 21.21,38.61 22.1,38.61 22.28,38.79 C14.1 23.11,38.1 23.05,38.03 U2.1
  Top 0.254: J5.5 66.55,19.56 66.93,19.18 66.93,12.95 67.31,12.57 91.19,12.57 91.69,13.08 96.77,13.08 97.92,11.94 119.63,11.94 119.89,11.68 J2.2 | v26.92,35.94 24.26,35.94 23.88,36.32 23.88,37.08 23.62,37.34 23.08,37.34 U2.1 | J7.3 19.3,36.07 19.68,36.45 19.68,36.96 20.1,37.37 U2.3 | F1.2 28.32,38.99 v27.94,38.61
  Top 0.406: F1.2 36.45,38.99 37.34,39.88 J6.2
  Bottom 0.254: v26.92,30.61 26.92,32.77 26.42,33.27 26.42,33.91 26.92,34.42 v26.92,35.94 26.92,38.1 27.3,38.48 27.81,38.48 v27.94,38.61 | 27.05,30.73 v26.92,30.61 | v30.48,30.73 30.48,28.32 30.73,28.07 | 30.73,28.07 30.86,27.94 32.38,27.94 32.89,27.43 v32.89,25.27 32.89,22.48 | v30.99,21.46 31.88,21.46 32.89,22.48 | 32.89,22.48 36.96,22.48 J5.5 | v26.92,30.61 25.91,29.59 v22.48,29.59 22.48,28.45 21.34,27.3 21.34,26.67 v21.72,26.29 | v26.92,30.61 26.92,28.07 27.3,27.69 30.35,27.69 30.73,28.07
5V1  (via drill 0.25, 0.3, 0.38)
  Top 0.203: U3.44 153.02,30.46 v153.16,30.61 153.29,30.73 C26.1 C16.1 | U3.24 158.97,25.11 v159.13,25.27 C21.1 | U3.17 156.62,21.57 156.72,21.46 v157.23,21.46 157.48,21.72 C23.1 | U3.59 147.94,26.31 | 147.94,26.31 147.57,26.67 C20.1 C19.1 | 147.94,26.31 v147.96,26.29 | C24.1 148.59,29.72 v148.72,29.59 149.2,29.11 U3.52 | C25.1 156.97,30.99 v156.72,30.73 156.62,30.63 U3.35 | U4.3 147.39,38.55 147.45,38.61 148.34,38.61 148.52,38.79 C28.1 149.35,38.1 149.29,38.03 U4.1
  Top 0.254: J10.5 192.79,19.56 193.17,19.18 193.17,12.95 193.55,12.57 217.42,12.57 217.93,13.08 223.01,13.08 224.16,11.94 245.87,11.94 246.13,11.68 J1.2 | v153.16,35.94 150.5,35.94 150.11,36.32 150.11,37.08 149.86,37.34 149.32,37.34 U4.1 | J12.3 145.54,36.07 145.92,36.45 145.92,36.96 146.33,37.37 U4.3 | F2.2 154.56,38.99 v154.18,38.61
  Top 0.406: F2.2 162.68,38.99 163.58,39.88 J11.2
  Bottom 0.254: v153.16,30.61 153.16,32.77 152.65,33.27 152.65,33.91 153.16,34.42 v153.16,35.94 153.16,38.1 153.54,38.48 154.05,38.48 v154.18,38.61 | 153.29,30.73 v153.16,30.61 | v156.72,30.73 156.72,28.32 156.97,28.07 | 156.97,28.07 157.1,27.94 158.62,27.94 159.13,27.43 v159.13,25.27 159.13,22.48 | v157.23,21.46 158.12,21.46 159.13,22.48 | 159.13,22.48 163.19,22.48 J10.5 | v153.16,30.61 152.15,29.59 v148.72,29.59 148.72,28.45 147.57,27.3 147.57,26.67 v147.96,26.29 | v153.16,30.61 153.16,28.07 153.54,27.69 156.59,27.69 156.97,28.07
5V2  (via drill 0.25, 0.3, 0.38)
  Top 0.203: U5.44 26.78,74.91 v26.92,75.06 27.05,75.18 C40.1 C30.1 | U5.24 32.73,69.56 v32.89,69.72 C35.1 | U5.17 30.38,66.02 30.48,65.91 v30.99,65.91 31.24,66.17 C37.1 | U5.59 21.7,70.76 | 21.7,70.76 21.34,71.12 C34.1 C33.1 | 21.7,70.76 v21.72,70.74 | C38.1 22.35,74.17 v22.48,74.04 22.96,73.56 U5.52 | C39.1 30.73,75.44 v30.48,75.18 30.38,75.08 U5.35 | U6.3 21.15,83 21.21,83.06 22.1,83.06 22.28,83.24 C42.1 23.11,82.55 23.05,82.48 U6.1
  Top 0.254: J16.5 66.55,64.01 66.93,63.63 66.93,57.4 67.31,57.02 91.19,57.02 91.69,57.53 96.77,57.53 97.92,56.39 119.63,56.39 119.89,56.13 J13.2 | v26.92,80.39 24.26,80.39 23.88,80.77 23.88,81.53 23.62,81.79 23.08,81.79 U6.1 | J18.3 19.3,80.52 19.68,80.9 19.68,81.41 20.1,81.82 U6.3 | F3.2 28.32,83.44 v27.94,83.06
  Top 0.406: F3.2 36.45,83.44 37.34,84.33 J17.2
  Bottom 0.254: v26.92,75.06 26.92,77.22 26.42,77.72 26.42,78.36 26.92,78.87 v26.92,80.39 26.92,82.55 27.3,82.93 27.81,82.93 v27.94,83.06 | 27.05,75.18 v26.92,75.06 | v30.48,75.18 30.48,72.77 30.73,72.52 | 30.73,72.52 30.86,72.39 32.38,72.39 32.89,71.88 v32.89,69.72 32.89,66.93 | v30.99,65.91 31.88,65.91 32.89,66.93 | 32.89,66.93 36.96,66.93 J16.5 | v26.92,75.06 25.91,74.04 v22.48,74.04 22.48,72.9 21.34,71.75 21.34,71.12 v21.72,70.74 | v26.92,75.06 26.92,72.52 27.3,72.14 30.35,72.14 30.73,72.52
5V3  (via drill 0.25, 0.3, 0.38)
  Top 0.203: U7.44 153.02,74.91 v153.16,75.06 153.29,75.18 C54.1 C44.1 | U7.24 158.97,69.56 v159.13,69.72 C49.1 | U7.17 156.62,66.02 156.72,65.91 v157.23,65.91 157.48,66.17 C51.1 | U7.59 147.94,70.76 | 147.94,70.76 147.57,71.12 C48.1 C47.1 | 147.94,70.76 v147.96,70.74 | C52.1 148.59,74.17 v148.72,74.04 149.2,73.56 U7.52 | C53.1 156.97,75.44 v156.72,75.18 156.62,75.08 U7.35 | U8.3 147.39,83 147.45,83.06 148.34,83.06 148.52,83.24 C56.1 149.35,82.55 149.29,82.48 U8.1
  Top 0.254: J22.5 192.79,64.01 193.17,63.63 193.17,57.4 193.55,57.02 217.42,57.02 217.93,57.53 223.01,57.53 224.16,56.39 245.87,56.39 246.13,56.13 J19.2 | v153.16,80.39 150.5,80.39 150.11,80.77 150.11,81.53 149.86,81.79 149.32,81.79 U8.1 | J24.3 145.54,80.52 145.92,80.9 145.92,81.41 146.33,81.82 U8.3 | F4.2 154.56,83.44 v154.18,83.06
  Top 0.406: F4.2 162.68,83.44 163.58,84.33 J23.2
  Bottom 0.254: v153.16,75.06 153.16,77.22 152.65,77.72 152.65,78.36 153.16,78.87 v153.16,80.39 153.16,82.55 153.54,82.93 154.05,82.93 v154.18,83.06 | 153.29,75.18 v153.16,75.06 | v156.72,75.18 156.72,72.77 156.97,72.52 | 156.97,72.52 157.1,72.39 158.62,72.39 159.13,71.88 v159.13,69.72 159.13,66.93 | v157.23,65.91 158.12,65.91 159.13,66.93 | 159.13,66.93 163.19,66.93 J22.5 | v153.16,75.06 152.15,74.04 v148.72,74.04 148.72,72.9 147.57,71.75 147.57,71.12 v147.96,70.74 | v153.16,75.06 153.16,72.52 153.54,72.14 156.59,72.14 156.97,72.52
5V4  (via drill 0.25, 0.3, 0.38)
  Top 0.203: U9.44 26.78,119.36 v26.92,119.51 27.05,119.63 C68.1 C58.1 | U9.24 32.73,114.01 v32.89,114.17 C63.1 | U9.17 30.38,110.47 30.48,110.36 v30.99,110.36 31.24,110.62 C65.1 | U9.59 21.7,115.21 | 21.7,115.21 21.34,115.57 C62.1 C61.1 | 21.7,115.21 v21.72,115.19 | C66.1 22.35,118.62 v22.48,118.49 22.96,118.01 U9.52 | C67.1 30.73,119.89 v30.48,119.63 30.38,119.53 U9.35 | U10.3 21.15,127.45 21.21,127.51 22.1,127.51 22.28,127.69 C70.1 23.11,127 23.05,126.93 U10.1
  Top 0.254: J28.5 66.55,108.46 66.93,108.08 66.93,101.85 67.31,101.47 91.19,101.47 91.69,101.98 96.77,101.98 97.92,100.84 119.63,100.84 119.89,100.58 J25.2 | v26.92,124.84 24.26,124.84 23.88,125.22 23.88,125.98 23.62,126.24 23.08,126.24 U10.1 | J30.3 19.3,124.97 19.68,125.35 19.68,125.86 20.1,126.27 U10.3 | F5.2 28.32,127.89 v27.94,127.51
  Top 0.406: F5.2 36.45,127.89 37.34,128.78 J29.2
  Bottom 0.254: v26.92,119.51 26.92,121.67 26.42,122.17 26.42,122.81 26.92,123.32 v26.92,124.84 26.92,127 27.3,127.38 27.81,127.38 v27.94,127.51 | 27.05,119.63 v26.92,119.51 | v30.48,119.63 30.48,117.22 30.73,116.97 | 30.73,116.97 30.86,116.84 32.38,116.84 32.89,116.33 v32.89,114.17 32.89,111.38 | v30.99,110.36 31.88,110.36 32.89,111.38 | 32.89,111.38 36.96,111.38 J28.5 | v26.92,119.51 25.91,118.49 v22.48,118.49 22.48,117.35 21.34,116.2 21.34,115.57 v21.72,115.19 | v26.92,119.51 26.92,116.97 27.3,116.59 30.35,116.59 30.73,116.97
5V5  (via drill 0.25, 0.3, 0.38)
  Top 0.203: U11.44 153.02,119.36 v153.16,119.51 153.29,119.63 C82.1 C72.1 | U11.24 158.97,114.01 v159.13,114.17 C77.1 | U11.17 156.62,110.47 156.72,110.36 v157.23,110.36 157.48,110.62 C79.1 | U11.59 147.94,115.21 | 147.94,115.21 147.57,115.57 C76.1 C75.1 | 147.94,115.21 v147.96,115.19 | C80.1 148.59,118.62 v148.72,118.49 149.2,118.01 U11.52 | C81.1 156.97,119.89 v156.72,119.63 156.62,119.53 U11.35 | U12.3 147.39,127.45 147.45,127.51 148.34,127.51 148.52,127.69 C84.1 149.35,127 149.29,126.93 U12.1
  Top 0.254: J34.5 192.79,108.46 193.17,108.08 193.17,101.85 193.55,101.47 217.42,101.47 217.93,101.98 223.01,101.98 224.16,100.84 245.87,100.84 246.13,100.58 J31.2 | v153.16,124.84 150.5,124.84 150.11,125.22 150.11,125.98 149.86,126.24 149.32,126.24 U12.1 | J36.3 145.54,124.97 145.92,125.35 145.92,125.86 146.33,126.27 U12.3 | F6.2 154.56,127.89 v154.18,127.51
  Top 0.406: F6.2 162.68,127.89 163.58,128.78 J35.2
  Bottom 0.254: v153.16,119.51 153.16,121.67 152.65,122.17 152.65,122.81 153.16,123.32 v153.16,124.84 153.16,127 153.54,127.38 154.05,127.38 v154.18,127.51 | 153.29,119.63 v153.16,119.51 | v156.72,119.63 156.72,117.22 156.97,116.97 | 156.97,116.97 157.1,116.84 158.62,116.84 159.13,116.33 v159.13,114.17 159.13,111.38 | v157.23,110.36 158.12,110.36 159.13,111.38 | 159.13,111.38 163.19,111.38 J34.5 | v153.16,119.51 152.15,118.49 v148.72,118.49 148.72,117.35 147.57,116.2 147.57,115.57 v147.96,115.19 | v153.16,119.51 153.16,116.97 153.54,116.59 156.59,116.59 156.97,116.97
BACK  (via drill 0.25)
  Top 0.406: R4.2 v24,11.68
  pour Bottom: 19.56,14.48 arc-90 20.83,15.75 27.18,15.75 arc-90 28.45,14.48 28.45,9.4 arc-90 27.18,8.13 20.83,8.13 arc-90 19.56,9.4
BACK1  (via drill 0.25)
  Top 0.406: R22.2 v150.24,11.68
  pour Bottom: 145.8,14.48 arc-90 147.07,15.75 153.42,15.75 arc-90 154.69,14.48 154.69,9.4 arc-90 153.42,8.13 147.07,8.13 arc-90 145.8,9.4
BACK2  (via drill 0.25)
  Top 0.406: R36.2 v24,56.13
  pour Bottom: 19.56,58.93 arc-90 20.83,60.2 27.18,60.2 arc-90 28.45,58.93 28.45,53.85 arc-90 27.18,52.58 20.83,52.58 arc-90 19.56,53.85
BACK3  (via drill 0.25)
  Top 0.406: R50.2 v150.24,56.13
  pour Bottom: 145.8,58.93 arc-90 147.07,60.2 153.42,60.2 arc-90 154.69,58.93 154.69,53.85 arc-90 153.42,52.58 147.07,52.58 arc-90 145.8,53.85
BACK4  (via drill 0.25)
  Top 0.406: R64.2 v24,100.58
  pour Bottom: 19.56,103.38 arc-90 20.83,104.65 27.18,104.65 arc-90 28.45,103.38 28.45,98.3 arc-90 27.18,97.03 20.83,97.03 arc-90 19.56,98.3
BACK5  (via drill 0.25)
  Top 0.406: R78.2 v150.24,100.58
  pour Bottom: 145.8,103.38 arc-90 147.07,104.65 153.42,104.65 arc-90 154.69,103.38 154.69,98.3 arc-90 153.42,97.03 147.07,97.03 arc-90 145.8,98.3
D+
  Top 0.203: R18.2 25.65,42.93 25.88,43.15 J3.D+
D+1
  Top 0.203: R16.2 151.89,42.93 152.12,43.15 J8.D+
D+2
  Top 0.203: R32.2 25.65,87.38 25.88,87.6 J14.D+
D+3
  Top 0.203: R46.2 151.89,87.38 152.12,87.6 J20.D+
D+4
  Top 0.203: R60.2 25.65,131.83 25.88,132.05 J26.D+
D+5
  Top 0.203: R74.2 151.89,131.83 152.12,132.05 J32.D+
D-
  Top 0.203: R19.2 27.05,42.42 26.53,42.94 J3.D-
D-1
  Top 0.203: R17.2 153.29,42.42 152.76,42.94 J8.D-
D-2
  Top 0.203: R33.2 27.05,86.87 26.53,87.39 J14.D-
D-3
  Top 0.203: R47.2 153.29,86.87 152.76,87.39 J20.D-
D-4
  Top 0.203: R61.2 27.05,131.32 26.53,131.84 J26.D-
D-5
  Top 0.203: R75.2 153.29,131.32 152.76,131.84 J32.D-
DOWN  (via drill 0.25)
  Top 0.406: R2.2 v44.32,11.68
  pour Bottom: 39.88,14.48 arc-90 41.15,15.75 47.5,15.75 arc-90 48.77,14.48 48.77,9.4 arc-90 47.5,8.13 41.15,8.13 arc-90 39.88,9.4
DOWN1  (via drill 0.25)
  Top 0.406: R20.2 v170.56,11.68
  pour Bottom: 166.12,14.48 arc-90 167.39,15.75 173.74,15.75 arc-90 175.01,14.48 175.01,9.4 arc-90 173.74,8.13 167.39,8.13 arc-90 166.12,9.4
DOWN2  (via drill 0.25)
  Top 0.406: R34.2 v44.32,56.13
  pour Bottom: 39.88,58.93 arc-90 41.15,60.2 47.5,60.2 arc-90 48.77,58.93 48.77,53.85 arc-90 47.5,52.58 41.15,52.58 arc-90 39.88,53.85
DOWN3  (via drill 0.25)
  Top 0.406: R48.2 v170.56,56.13
  pour Bottom: 166.12,58.93 arc-90 167.39,60.2 173.74,60.2 arc-90 175.01,58.93 175.01,53.85 arc-90 173.74,52.58 167.39,52.58 arc-90 166.12,53.85
DOWN4  (via drill 0.25)
  Top 0.406: R62.2 v44.32,100.58
  pour Bottom: 39.88,103.38 arc-90 41.15,104.65 47.5,104.65 arc-90 48.77,103.38 48.77,98.3 arc-90 47.5,97.03 41.15,97.03 arc-90 39.88,98.3
DOWN5  (via drill 0.25)
  Top 0.406: R76.2 v170.56,100.58
  pour Bottom: 166.12,103.38 arc-90 167.39,104.65 173.74,104.65 arc-90 175.01,103.38 175.01,98.3 arc-90 173.74,97.03 167.39,97.03 arc-90 166.12,98.3
ENTER  (via drill 0.25)
  Top 0.406: R3.2 v34.16,11.68
  pour Bottom: 29.72,14.48 arc-90 30.99,15.75 37.34,15.75 arc-90 38.61,14.48 38.61,9.4 arc-90 37.34,8.13 30.99,8.13 arc-90 29.72,9.4
ENTER1  (via drill 0.25)
  Top 0.406: R21.2 v160.4,11.68
  pour Bottom: 155.96,14.48 arc-90 157.23,15.75 163.58,15.75 arc-90 164.85,14.48 164.85,9.4 arc-90 163.58,8.13 157.23,8.13 arc-90 155.96,9.4
ENTER2  (via drill 0.25)
  Top 0.406: R35.2 v34.16,56.13
  pour Bottom: 29.72,58.93 arc-90 30.99,60.2 37.34,60.2 arc-90 38.61,58.93 38.61,53.85 arc-90 37.34,52.58 30.99,52.58 arc-90 29.72,53.85
ENTER3  (via drill 0.25)
  Top 0.406: R49.2 v160.4,56.13
  pour Bottom: 155.96,58.93 arc-90 157.23,60.2 163.58,60.2 arc-90 164.85,58.93 164.85,53.85 arc-90 163.58,52.58 157.23,52.58 arc-90 155.96,53.85
ENTER4  (via drill 0.25)
  Top 0.406: R63.2 v34.16,100.58
  pour Bottom: 29.72,103.38 arc-90 30.99,104.65 37.34,104.65 arc-90 38.61,103.38 38.61,98.3 arc-90 37.34,97.03 30.99,97.03 arc-90 29.72,98.3
ENTER5  (via drill 0.25)
  Top 0.406: R77.2 v160.4,100.58
  pour Bottom: 155.96,103.38 arc-90 157.23,104.65 163.58,104.65 arc-90 164.85,103.38 164.85,98.3 arc-90 163.58,97.03 157.23,97.03 arc-90 155.96,98.3
GND  (via drill 0.25, 0.38)
  Top 0.203: U1.25 27.58,25.51 U1.69 | U1.9 U1.69 | U1.8 26.78,25.51 U1.69 | U1.7 26.38,25.11 U1.69 | U1.5 25.58,24.31 U1.69 | U1.58 26.38,26.71 | C5.2 20.9,20.5 20.79,20.61 C1.2 18.96,20.61 v18.92,20.57 | C12.2 v35.05,26.67 | C4.2 v35.94,25.27 | C8.2 v33.66,30.99 | C10.2 C9.2 | C9.2 C11.2 | C9.2 v27.05,33.66 | C7.2 v19.18,29.72 | C2.2 C3.2 v18.67,26.67 | C6.2 v34.42,21.72 | U2.2 v22.1,36.07 | R9.2 v51.94,34.54 | JP1.1 v65.28,27.18 | C13.2 v20.7,33.27 | C14.2 22.17,39.95 v22.1,39.88 | U1.43 U1.69 | U1.45 26.38,26.71 | 26.38,26.71 U1.69 | v29.59,28.32 U1.69 | R12.2 v42.42,35.43
  Top 0.254: J3.GND 24.58,42.87 v24.38,42.67
  other vias: 27.18,25.91 25.65,24 29.08,24 24.77,28.32 18.29,15.75 29.08,15.75 39.24,15.75 49.4,15.75 58.93,15.75
  pour Top (hatched): 18.29,8.13 18.29,15.75 58.93,15.75 58.93,8.13
  pour Bottom (rank 2): 130.05,6.86 9.4,6.86 arc-90 6.86,9.4 6.86,46.23 arc-90 9.4,48.77 130.05,48.77 arc-90 132.59,46.23 132.59,9.4 arc-90
GND1  (via drill 0.25, 0.38)
  Top 0.203: U3.25 153.82,25.51 U3.69 | U3.9 U3.69 | U3.8 153.02,25.51 U3.69 | U3.7 152.62,25.11 U3.69 | U3.5 151.82,24.31 U3.69 | U3.58 152.62,26.71 | C22.2 147.14,20.5 147.03,20.61 C15.2 145.2,20.61 v145.16,20.57 | C18.2 v161.29,26.67 | C21.2 v162.18,25.27 | C25.2 v159.89,30.99 | C16.2 C26.2 | C26.2 C17.2 | C26.2 v153.29,33.66 | C24.2 v145.41,29.72 | C19.2 C20.2 v144.91,26.67 | C23.2 v160.66,21.72 | U4.2 v148.34,36.07 | R27.2 v178.18,34.54 | JP2.1 v191.52,27.18 | C27.2 v146.94,33.27 | C28.2 148.41,39.95 v148.34,39.88 | U3.43 U3.69 | U3.45 152.62,26.71 | 152.62,26.71 U3.69 | v155.83,28.32 U3.69 | R28.2 v168.66,35.43
  Top 0.254: J8.GND 150.81,42.87 v150.62,42.67
  other vias: 153.42,25.91 151.89,24 155.32,24 151,28.32 144.53,15.75 155.32,15.75 165.48,15.75 175.64,15.75 185.17,15.75
  pour Top (hatched): 144.53,8.13 144.53,15.75 185.17,15.75 185.17,8.13
  pour Bottom (rank 2): 256.29,6.86 135.64,6.86 arc-90 133.1,9.4 133.1,46.23 arc-90 135.64,48.77 256.29,48.77 arc-90 258.83,46.23 258.83,9.4 arc-90
GND2  (via drill 0.25, 0.38)
  Top 0.203: U5.25 27.58,69.96 U5.69 | U5.9 U5.69 | U5.8 26.78,69.96 U5.69 | U5.7 26.38,69.56 U5.69 | U5.5 25.58,68.76 U5.69 | U5.58 26.38,71.16 | C36.2 20.9,64.95 20.79,65.06 C29.2 18.96,65.06 v18.92,65.02 | C32.2 v35.05,71.12 | C35.2 v35.94,69.72 | C39.2 v33.66,75.44 | C30.2 C40.2 | C40.2 C31.2 | C40.2 v27.05,78.11 | C38.2 v19.18,74.17 | C33.2 C34.2 v18.67,71.12 | C37.2 v34.42,66.17 | U6.2 v22.1,80.52 | R41.2 v51.94,78.99 | JP3.1 v65.28,71.63 | C41.2 v20.7,77.72 | C42.2 22.17,84.4 v22.1,84.33 | U5.43 U5.69 | U5.45 26.38,71.16 | 26.38,71.16 U5.69 | v29.59,72.77 U5.69 | R42.2 v42.42,79.88
  Top 0.254: J14.GND 24.58,87.31 v24.38,87.12
  other vias: 27.18,70.36 25.65,68.45 29.08,68.45 24.77,72.77 18.29,60.2 29.08,60.2 39.24,60.2 49.4,60.2 58.93,60.2
  pour Top (hatched): 18.29,52.58 18.29,60.2 58.93,60.2 58.93,52.58
  pour Bottom (rank 2): 130.05,51.31 9.4,51.31 arc-90 6.86,53.85 6.86,90.68 arc-90 9.4,93.22 130.05,93.22 arc-90 132.59,90.68 132.59,53.85 arc-90
GND3  (via drill 0.25, 0.38)
  Top 0.203: U7.25 153.82,69.96 U7.69 | U7.9 U7.69 | U7.8 153.02,69.96 U7.69 | U7.7 152.62,69.56 U7.69 | U7.5 151.82,68.76 U7.69 | U7.58 152.62,71.16 | C50.2 147.14,64.95 147.03,65.06 C43.2 145.2,65.06 v145.16,65.02 | C46.2 v161.29,71.12 | C49.2 v162.18,69.72 | C53.2 v159.89,75.44 | C44.2 C54.2 | C54.2 C45.2 | C54.2 v153.29,78.11 | C52.2 v145.41,74.17 | C47.2 C48.2 v144.91,71.12 | C51.2 v160.66,66.17 | U8.2 v148.34,80.52 | R55.2 v178.18,78.99 | JP4.1 v191.52,71.63 | C55.2 v146.94,77.72 | C56.2 148.41,84.4 v148.34,84.33 | U7.43 U7.69 | U7.45 152.62,71.16 | 152.62,71.16 U7.69 | v155.83,72.77 U7.69 | R56.2 v168.66,79.88
  Top 0.254: J20.GND 150.81,87.31 v150.62,87.12
  other vias: 153.42,70.36 151.89,68.45 155.32,68.45 151,72.77 144.53,60.2 155.32,60.2 165.48,60.2 175.64,60.2 185.17,60.2
  pour Top (hatched): 144.53,52.58 144.53,60.2 185.17,60.2 185.17,52.58
  pour Bottom (rank 2): 256.29,51.31 135.64,51.31 arc-90 133.1,53.85 133.1,90.68 arc-90 135.64,93.22 256.29,93.22 arc-90 258.83,90.68 258.83,53.85 arc-90
GND4  (via drill 0.25, 0.38)
  Top 0.203: U9.25 27.58,114.41 U9.69 | U9.9 U9.69 | U9.8 26.78,114.41 U9.69 | U9.7 26.38,114.01 U9.69 | U9.5 25.58,113.21 U9.69 | U9.58 26.38,115.61 | C64.2 20.9,109.4 20.79,109.51 C57.2 18.96,109.51 v18.92,109.47 | C60.2 v35.05,115.57 | C63.2 v35.94,114.17 | C67.2 v33.66,119.89 | C58.2 C68.2 | C68.2 C59.2 | C68.2 v27.05,122.56 | C66.2 v19.18,118.62 | C61.2 C62.2 v18.67,115.57 | C65.2 v34.42,110.62 | U10.2 v22.1,124.97 | R69.2 v51.94,123.44 | JP5.1 v65.28,116.08 | C69.2 v20.7,122.17 | C70.2 22.17,128.85 v22.1,128.78 | U9.43 U9.69 | U9.45 26.38,115.61 | 26.38,115.61 U9.69 | v29.59,117.22 U9.69 | R70.2 v42.42,124.33
  Top 0.254: J26.GND 24.58,131.76 v24.38,131.57
  other vias: 27.18,114.81 25.65,112.9 29.08,112.9 24.77,117.22 18.29,104.65 29.08,104.65 39.24,104.65 49.4,104.65 58.93,104.65
  pour Top (hatched): 18.29,97.03 18.29,104.65 58.93,104.65 58.93,97.03
  pour Bottom (rank 2): 130.05,95.76 9.4,95.76 arc-90 6.86,98.3 6.86,135.13 arc-90 9.4,137.67 130.05,137.67 arc-90 132.59,135.13 132.59,98.3 arc-90
GND5  (via drill 0.25, 0.38)
  Top 0.203: U11.25 153.82,114.41 U11.69 | U11.9 U11.69 | U11.8 153.02,114.41 U11.69 | U11.7 152.62,114.01 U11.69 | U11.5 151.82,113.21 U11.69 | U11.58 152.62,115.61 | C78.2 147.14,109.4 147.03,109.51 C71.2 145.2,109.51 v145.16,109.47 | C74.2 v161.29,115.57 | C77.2 v162.18,114.17 | C81.2 v159.89,119.89 | C72.2 C82.2 | C82.2 C73.2 | C82.2 v153.29,122.56 | C80.2 v145.41,118.62 | C75.2 C76.2 v144.91,115.57 | C79.2 v160.66,110.62 | U12.2 v148.34,124.97 | R83.2 v178.18,123.44 | JP6.1 v191.52,116.08 | C83.2 v146.94,122.17 | C84.2 148.41,128.85 v148.34,128.78 | U11.43 U11.69 | U11.45 152.62,115.61 | 152.62,115.61 U11.69 | v155.83,117.22 U11.69 | R84.2 v168.66,124.33
  Top 0.254: J32.GND 150.81,131.76 v150.62,131.57
  other vias: 153.42,114.81 151.89,112.9 155.32,112.9 151,117.22 144.53,104.65 155.32,104.65 165.48,104.65 175.64,104.65 185.17,104.65
  pour Top (hatched): 144.53,97.03 144.53,104.65 185.17,104.65 185.17,97.03
  pour Bottom (rank 2): 256.29,95.76 135.64,95.76 arc-90 133.1,98.3 133.1,135.13 arc-90 135.64,137.67 256.29,137.67 arc-90 258.83,135.13 258.83,98.3 arc-90
GND-ISO
  Top 0.203: R8.P$1 87.38,19.56 87.63,19.3 87.63,17.27 87.38,17.02 68.45,17.02 67.82,17.65 67.82,23.37 67.44,23.75 38.73,23.75 38.23,23.24 37.59,23.24 37.21,23.62 32.26,23.62 31.74,23.11 U1.19
  Top 0.254: 67.56,27.18 JP1.2
  Top 1.27: R8.P$1 71.63,19.56 69.09,22.1 69.09,27.18 | 69.09,27.18 69.09,33.4 J4.2 | 69.09,27.18 67.56,27.18
GND-ISO1
  Top 0.203: R26.P$1 213.61,19.56 213.87,19.3 213.87,17.27 213.61,17.02 194.69,17.02 194.06,17.65 194.06,23.37 193.68,23.75 164.97,23.75 164.47,23.24 163.83,23.24 163.45,23.62 158.5,23.62 157.98,23.11 U3.19
  Top 0.254: 193.8,27.18 JP2.2
  Top 1.27: R26.P$1 197.87,19.56 195.33,22.1 195.33,27.18 | 195.33,27.18 195.33,33.4 J9.2 | 195.33,27.18 193.8,27.18
GND-ISO2
  Top 0.203: R40.P$1 87.38,64.01 87.63,63.75 87.63,61.72 87.38,61.47 68.45,61.47 67.82,62.1 67.82,67.82 67.44,68.2 38.73,68.2 38.23,67.69 37.59,67.69 37.21,68.07 32.26,68.07 31.74,67.56 U5.19
  Top 0.254: 67.56,71.63 JP3.2
  Top 1.27: R40.P$1 71.63,64.01 69.09,66.55 69.09,71.63 | 69.09,71.63 69.09,77.85 J15.2 | 69.09,71.63 67.56,71.63
GND-ISO3
  Top 0.203: R54.P$1 213.61,64.01 213.87,63.75 213.87,61.72 213.61,61.47 194.69,61.47 194.06,62.1 194.06,67.82 193.68,68.2 164.97,68.2 164.47,67.69 163.83,67.69 163.45,68.07 158.5,68.07 157.98,67.56 U7.19
  Top 0.254: 193.8,71.63 JP4.2
  Top 1.27: R54.P$1 197.87,64.01 195.33,66.55 195.33,71.63 | 195.33,71.63 195.33,77.85 J21.2 | 195.33,71.63 193.8,71.63
GND-ISO4
  Top 0.203: R68.P$1 87.38,108.46 87.63,108.2 87.63,106.17 87.38,105.92 68.45,105.92 67.82,106.55 67.82,112.27 67.44,112.65 38.73,112.65 38.23,112.14 37.59,112.14 37.21,112.52 32.26,112.52 31.74,112.01 U9.19
  Top 0.254: 67.56,116.08 JP5.2
  Top 1.27: R68.P$1 71.63,108.46 69.09,111 69.09,116.08 | 69.09,116.08 69.09,122.3 J27.2 | 69.09,116.08 67.56,116.08
GND-ISO5
  Top 0.203: R82.P$1 213.61,108.46 213.87,108.2 213.87,106.17 213.61,105.92 194.69,105.92 194.06,106.55 194.06,112.27 193.68,112.65 164.97,112.65 164.47,112.14 163.83,112.14 163.45,112.52 158.5,112.52 157.98,112.01 U11.19
  Top 0.254: 193.8,116.08 JP6.2